# Altium PCB PCB1.PcbDoc
Units mm, origin at the board's own origin, x right, y up, seen from the top; angles counter-clockwise.
Board outline 61 x 85 mm, 4 copper layers (Top Layer, Layer 1, Layer 2, Bottom Layer), stack 0.55 mm thick; 5 components, 34 nets, 80 pads, 421 vias.
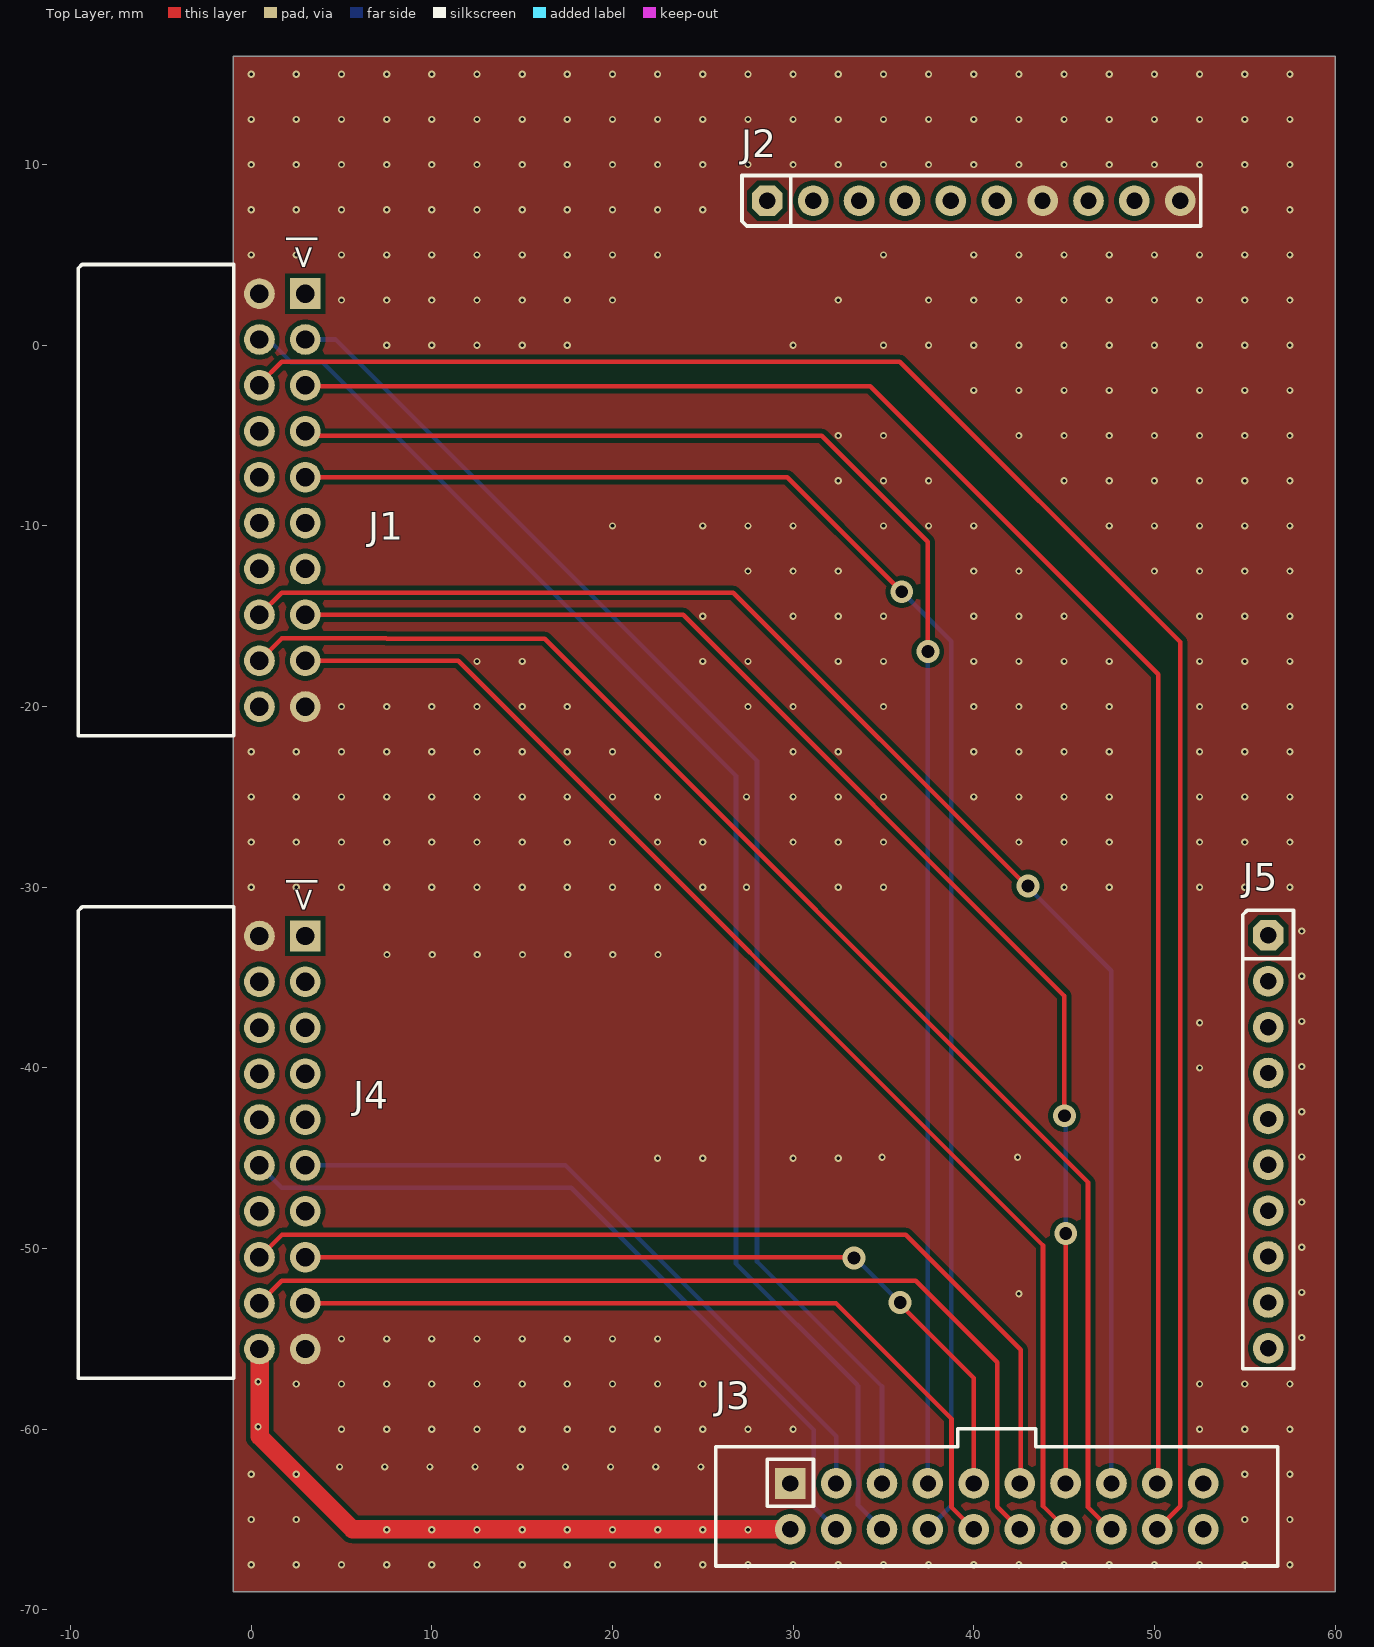
[diagram p0: Top Layer view]
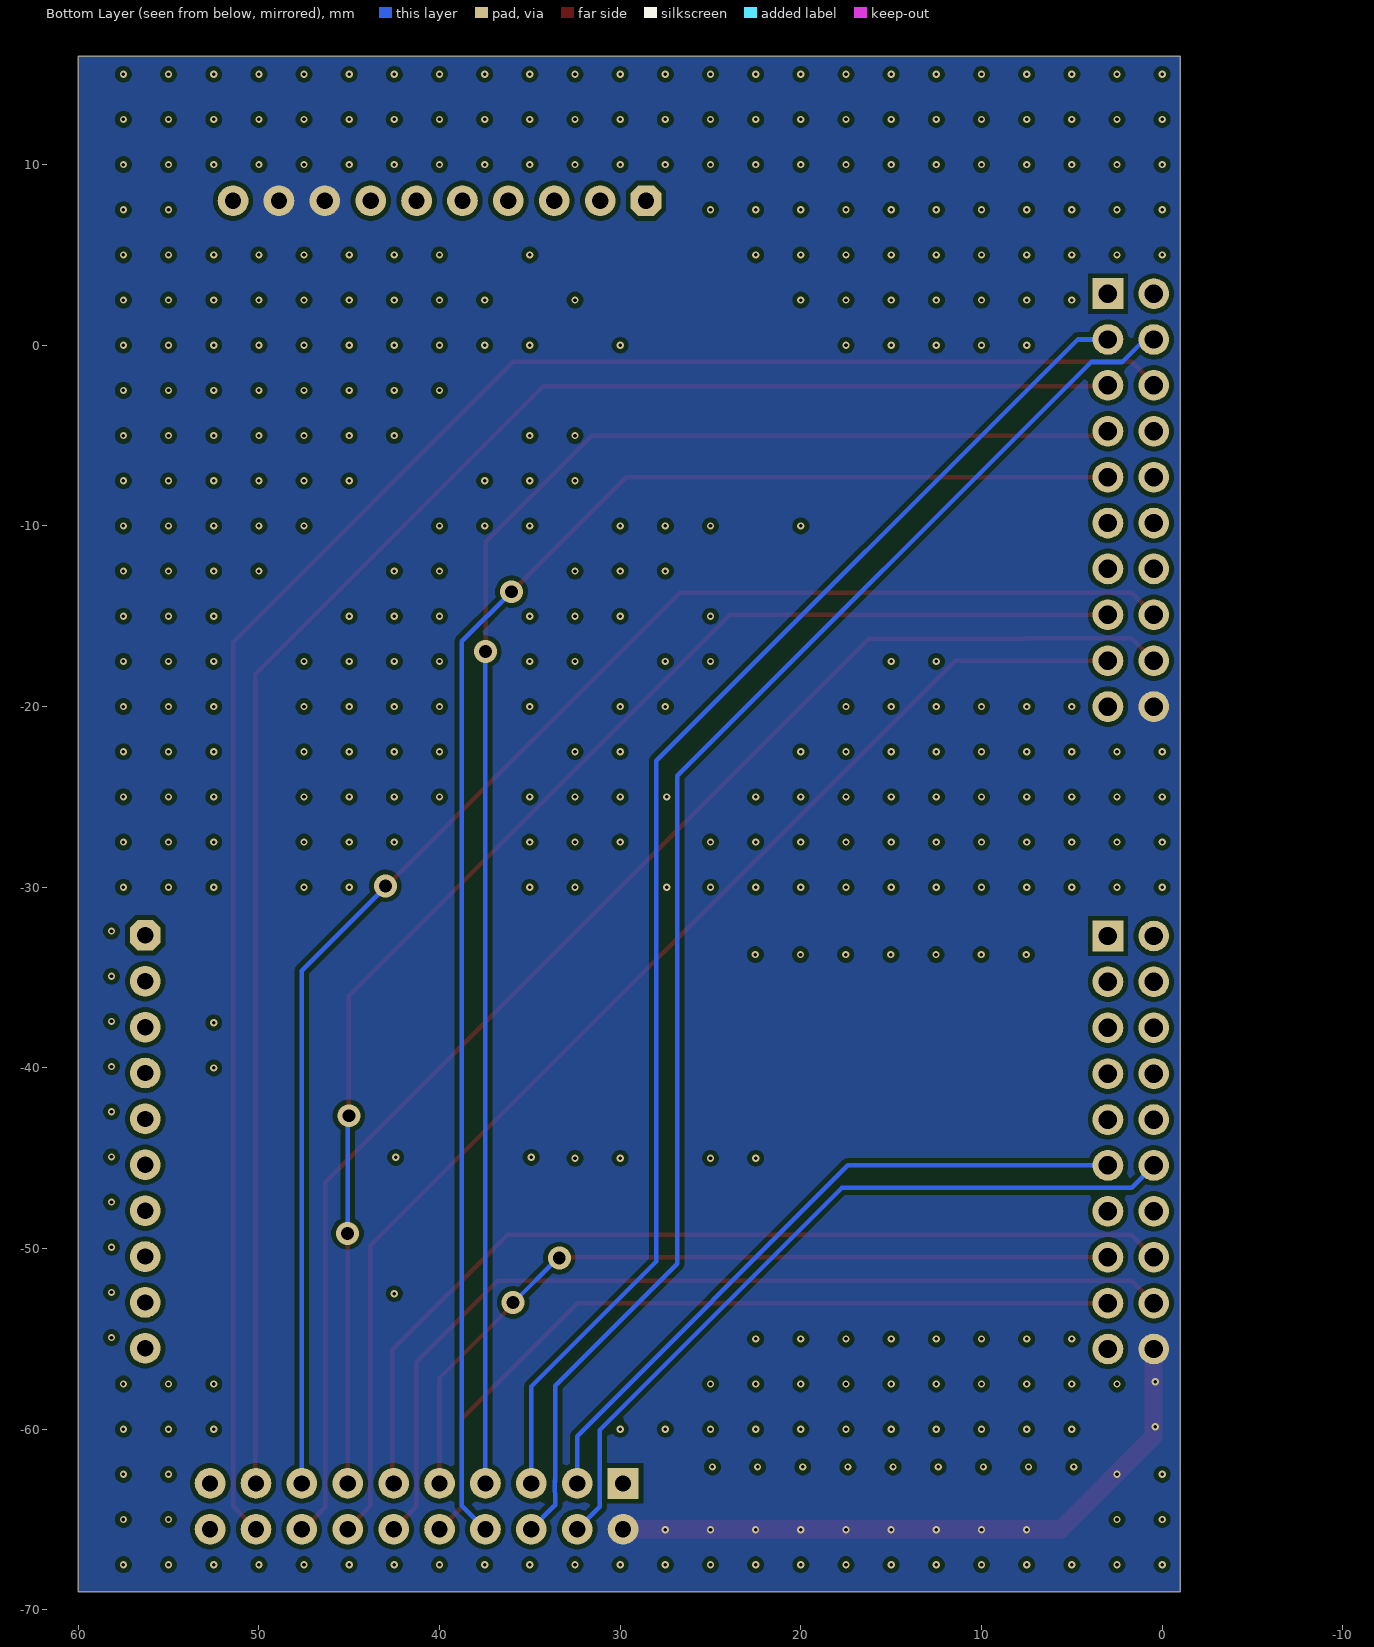
[diagram p1: Bottom Layer view, seen from below]
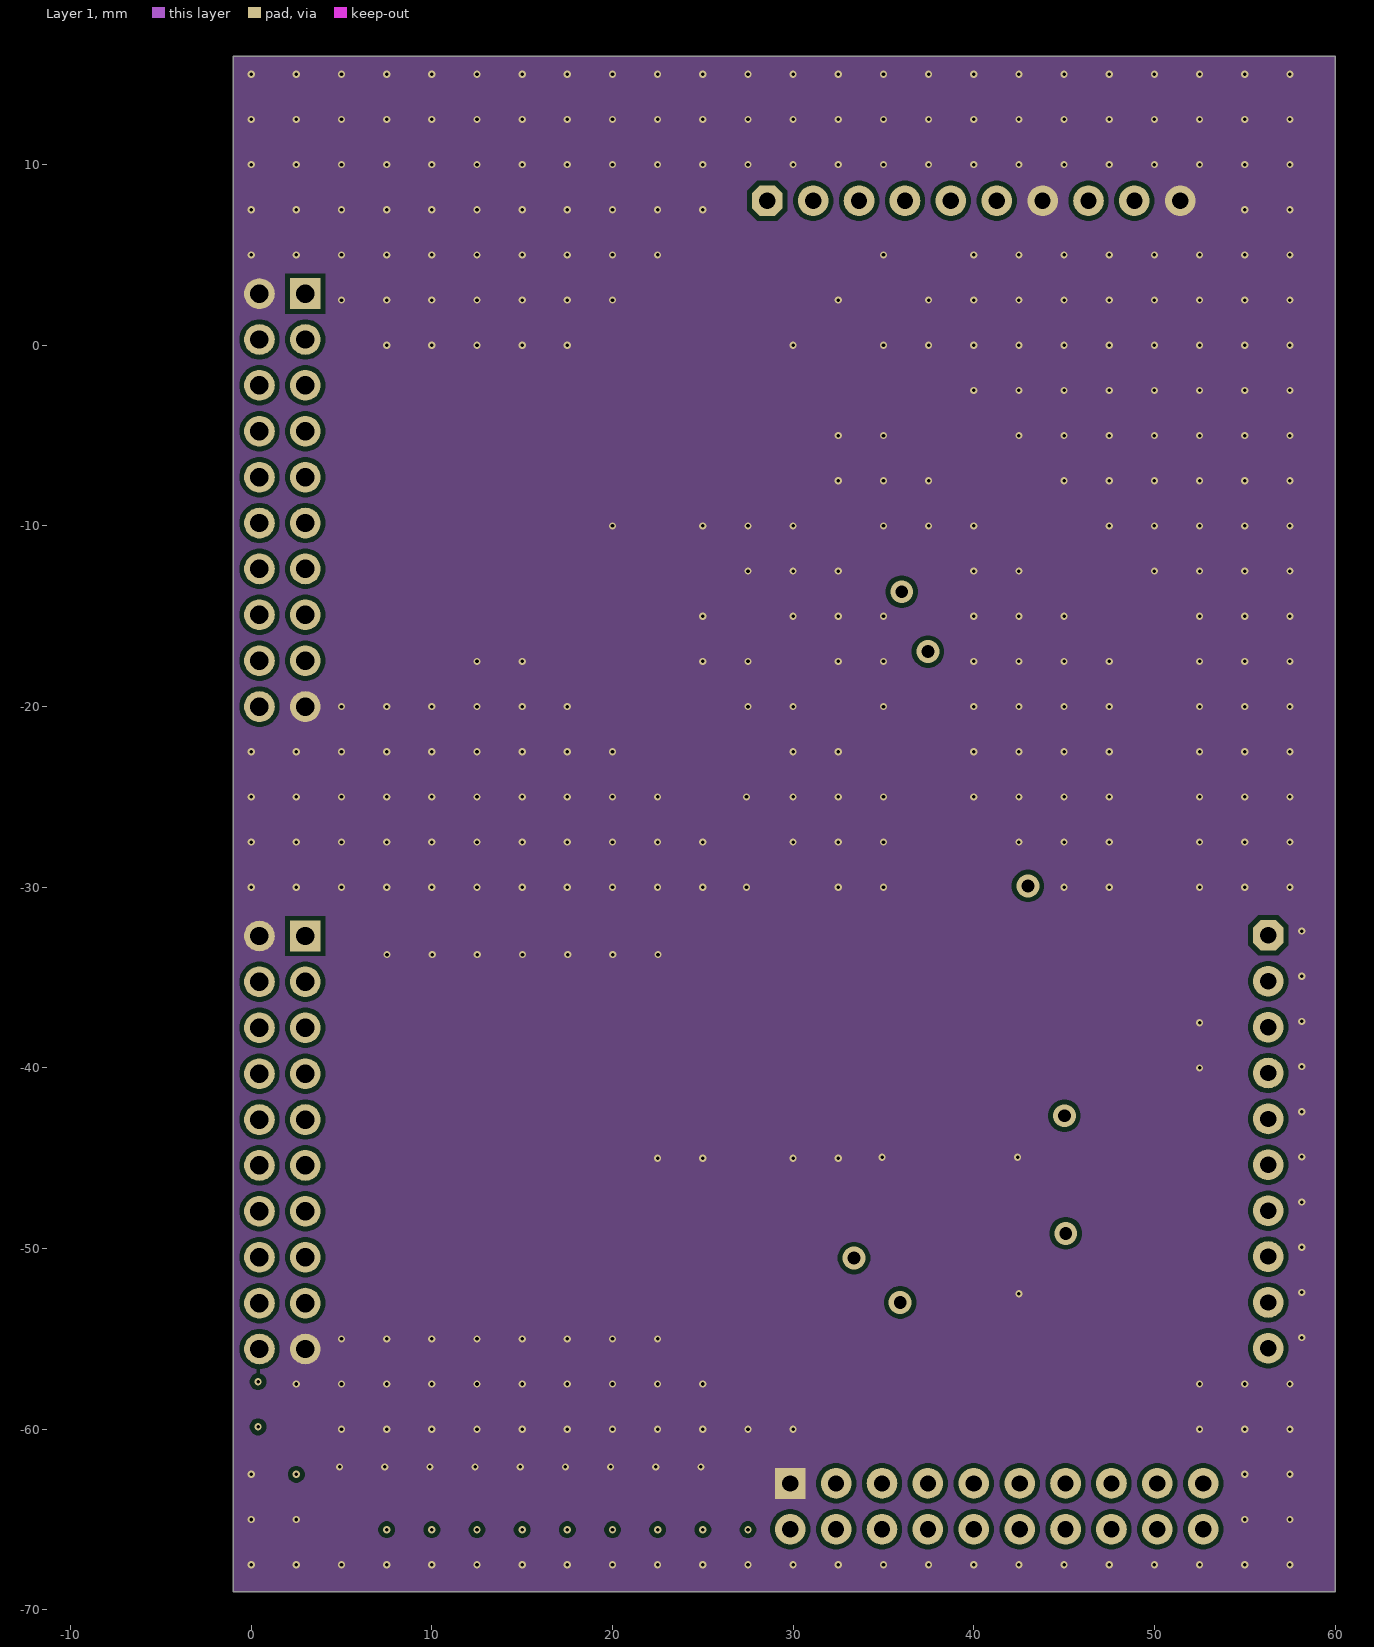
[diagram p2: Layer 1]
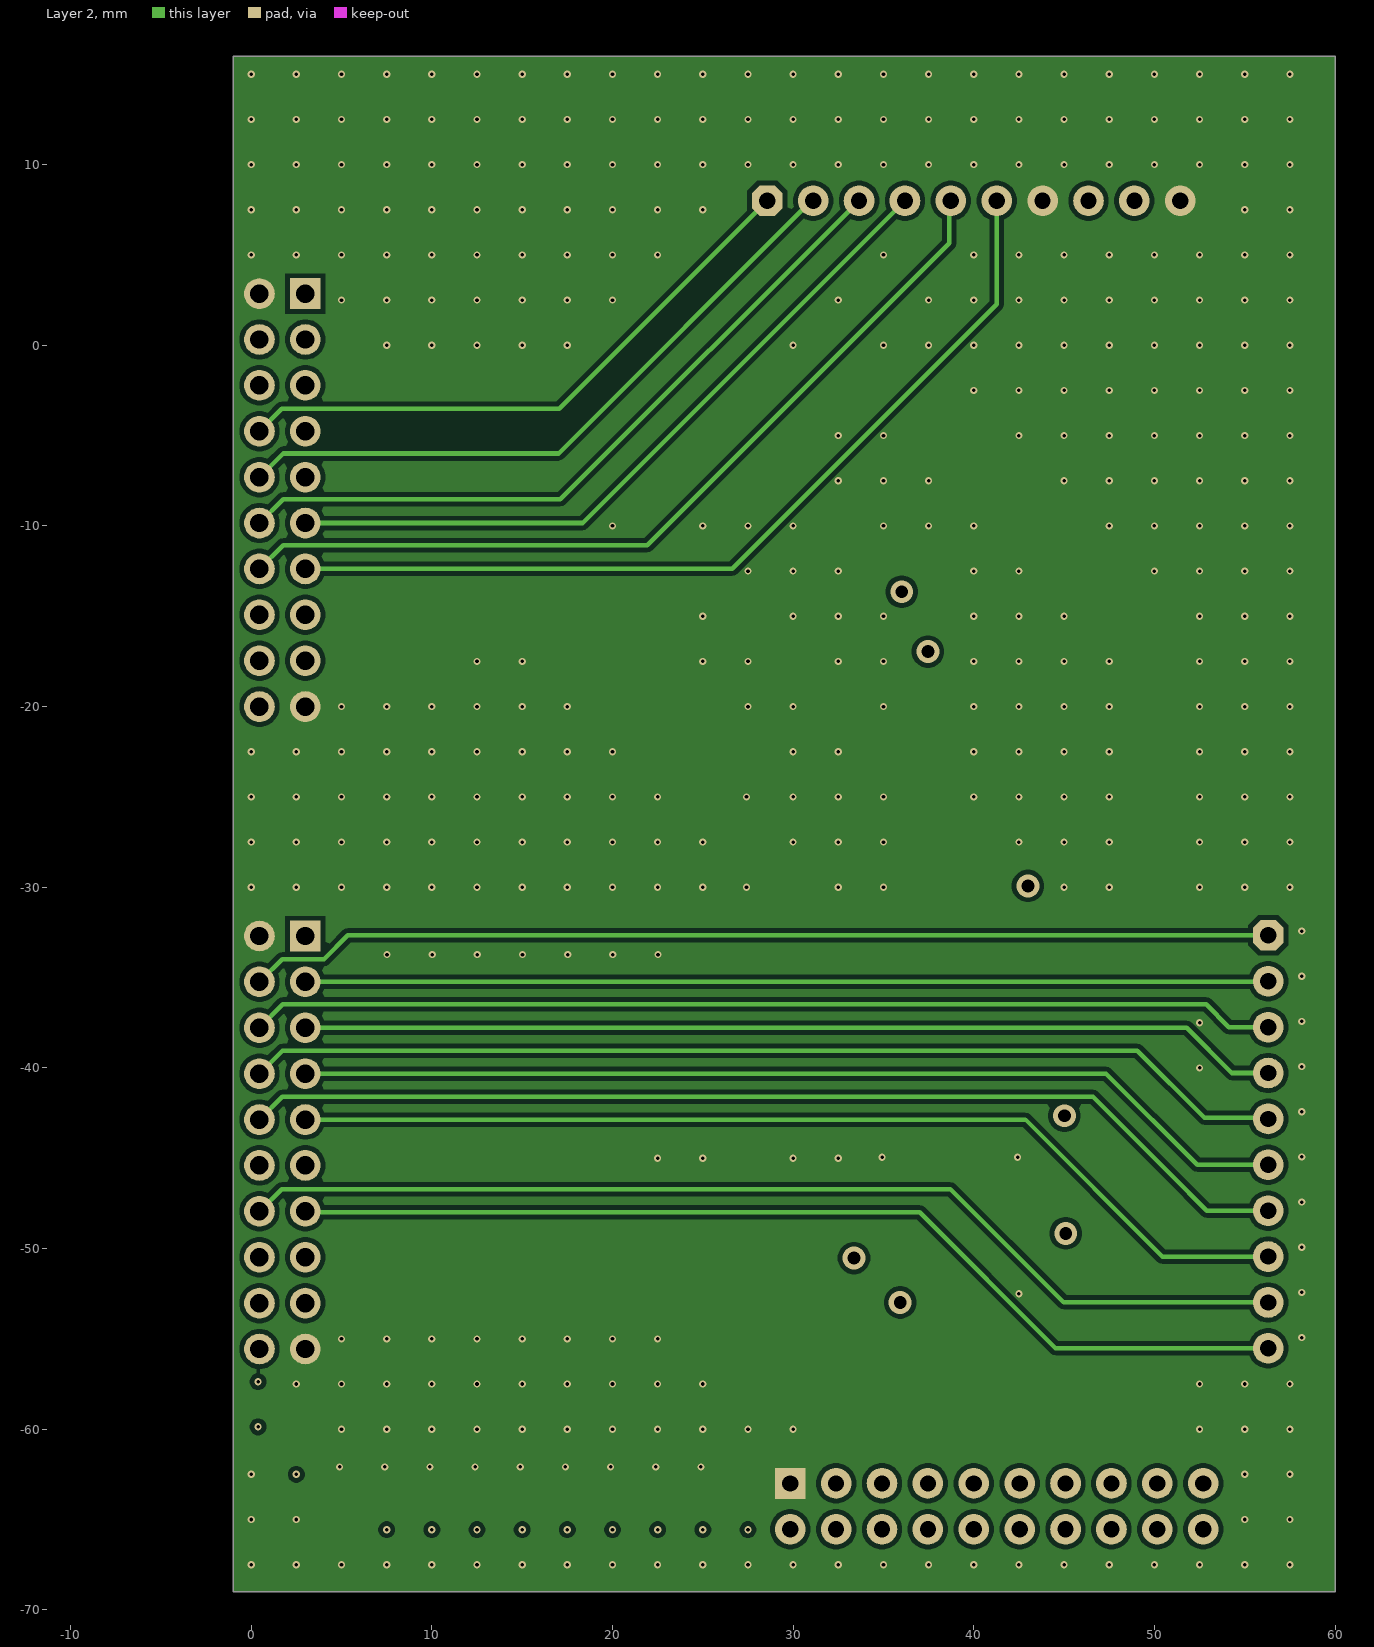
[diagram p3: Layer 2]
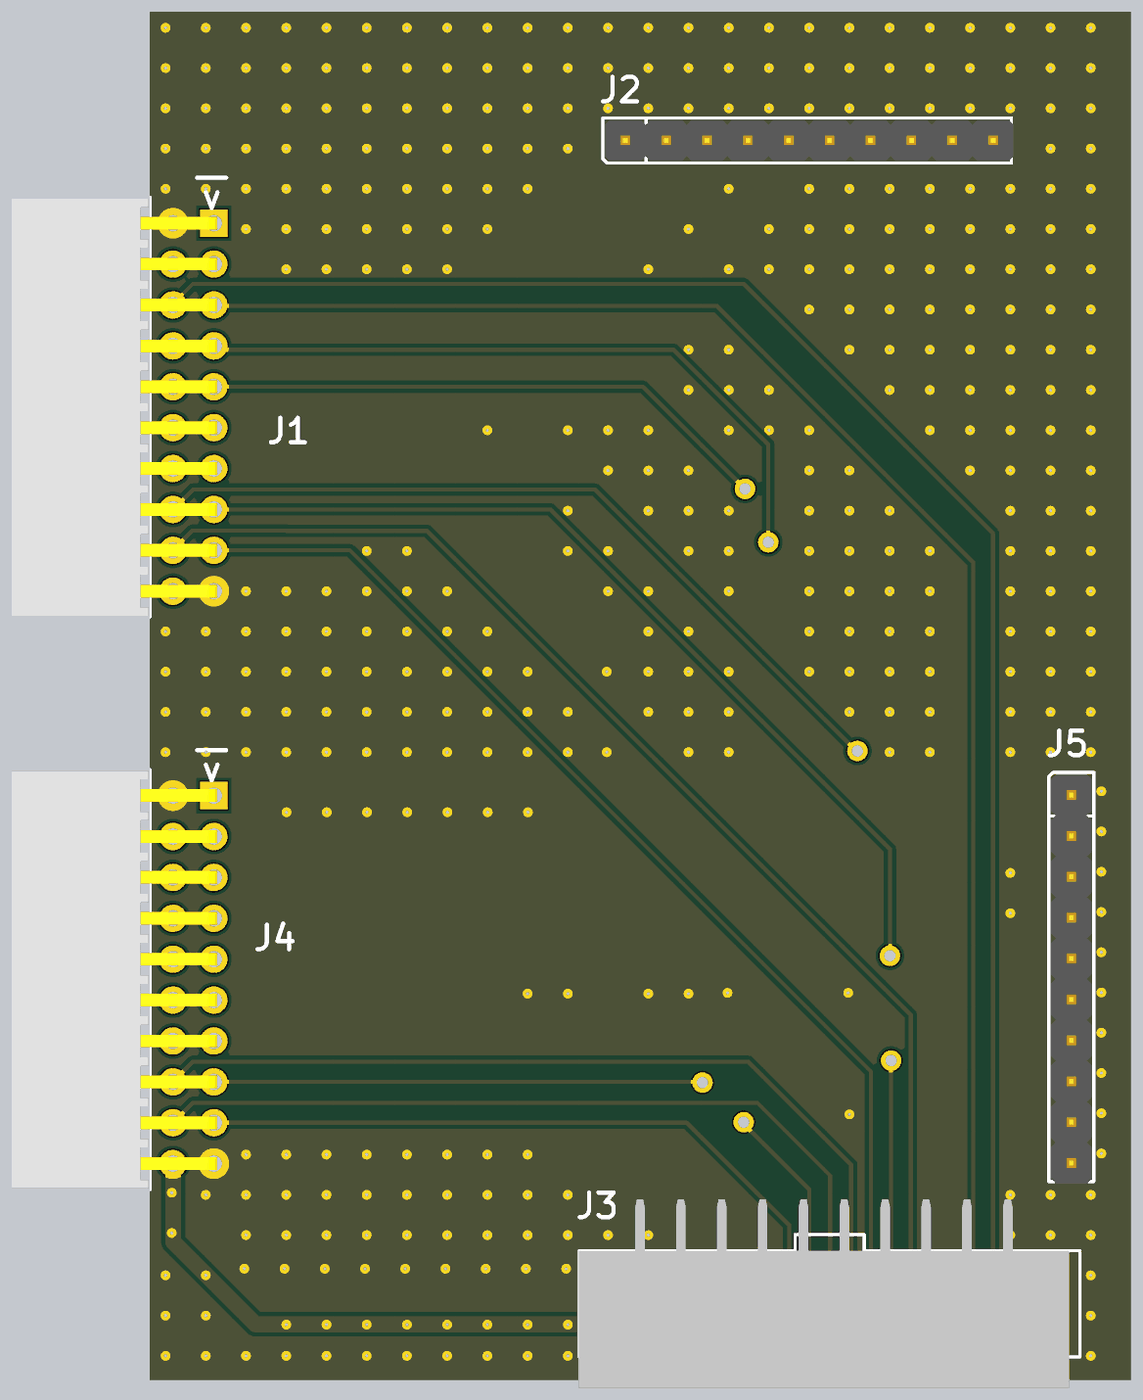
[diagram p4: 3D render of the assembled board from above, using the file's embedded part models]

## Layer stack, top to bottom
Top Solder: solder mask 0.0102, Solder Resist, Dk 3.5
Top Layer: signal copper 0.009
Dielectric 2: prepreg 0.0711, PP-006, Dk 4.1
Layer 1: signal copper 0.035
Dielectric 1: dielectric 0.32, FR-4, Dk 4.8
Layer 2: signal copper 0.035
Dielectric 3: prepreg 0.0711, PP-006, Dk 4.1
Bottom Layer: signal copper 0.009
Bottom Solder: solder mask 0.0102, Solder Resist, Dk 3.5

## Board outline
-1,-69 60,-69 60,16 -1,16

## Design rules (kind name [scope] priority, off if disabled: settings)
Clearance [All] p1: gap=0.254 ignorepadtopadclearanceinfootprint=FALSE
PolygonConnect [All] p1: connectstyle=Direct reliefconductorwidth=0.254 reliefentries=4 polygonreliefangle="90 Angle" airgapwidth=0.254
RoutingVias [All] p1: holewidth=0.711 width=1.27 viastyle="Through Hole" minholewidth=0.711 minwidth=1.27 maxholewidth=0.711 maxwidth=1.27
SolderMaskExpansion [All] p1: expansion=0.102 istentingtop=FALSE
Width [All] p1: maxlimit=0.254 minlimit=0.254 preferedwidth=0.254
30 further rules are at their usual default settings.

## Components (designator, comment, footprint, x,y, rotation, side; value= is the part's Value field where it differs from the comment)
J1 "Header 2x10" HDR_F_2.54_2x10_RA_180 1.73,-8.57 r90 top locked value="HDR-2.54 Female 2x10 RA Rotated 180"
J2 "Header 1x10" HDR_M_2.54_1x10 40,8 r0 top value="HDR-2.54 Male 1x10"
J3 "Header 2x10" HDR_F_2.54_2x10_SFH11-PBPC-D10-ST-BK 41.27,-64.27 r0 top locked value="HDR-2.54 Female 2x10"
J4 "Header 2x10" HDR_F_2.54_2x10_RA_180 1.73,-44.13 r90 top locked value="HDR-2.54 Female 2x10 RA Rotated 180"
J5 "Header 1x10" HDR_M_2.54_1x10 56.295,-44.094 r270 top value="HDR-2.54 Male 1x10"

## Footprints (in the part's own frame and the unit in brackets; to place one, negate y for a bottom-side part, rotate by r counter-clockwise, add the part's x,y. Pads: shape width x height; smd on the part's side, far side on the other; paste and mask are expansions set on the pad)
HDR_F_2.54_2x10_RA_180 [mm] "Header Female Horizontal 2x10 Way 2.54mm Pitch rotated 180"
  rect 1.7x1.7 hole 1.02: 1(11.43,-1.27)
  round 1.7 hole 1.02: 2(11.43,1.27) 3(8.89,-1.27) 4(8.89,1.27) 5(6.35,-1.27) 6(6.35,1.27) 7(3.81,-1.27) 8(3.81,1.27) 9(1.27,-1.27) 10(1.27,1.27) 11(-1.27,-1.27) 12(-1.27,1.27) 13(-3.81,-1.27) 14(-3.81,1.27) 15(-6.35,-1.27) 16(-6.35,1.27) 17(-8.89,-1.27) 18(-8.89,1.27) 19(-11.43,-1.27) 20(-11.43,1.27)
  silkscreen extent -13.04,2.7 13.04,11.3, body extent -12.95,-1.47 12.95,11.3, height 4.98
HDR_F_2.54_2x10_SFH11-PBPC-D10-ST-BK [mm] "Header Female Vertical 2x10 Way 2.54mm Pitch"
  rect 1.7x1.7 hole 0.9: 1(-11.43,1.27)
  round 1.7 hole 0.9: 2(-11.43,-1.27) 3(-8.89,1.27) 4(-8.89,-1.27) 5(-6.35,1.27) 6(-6.35,-1.27) 7(-3.81,1.27) 8(-3.81,-1.27) 9(-1.27,1.27) 10(-1.27,-1.27) 11(1.27,1.27) 12(1.27,-1.27) 13(3.81,1.27) 14(3.81,-1.27) 15(6.35,1.27) 16(6.35,-1.27) 17(8.89,1.27) 18(8.89,-1.27) 19(11.43,1.27) 20(11.43,-1.27)
  silkscreen extent -15.55,-3.3 15.55,4.3, body extent -15.24,-3 15.24,4, height 8.51
HDR_M_2.54_1x10 [mm] "Header Male Vertical 10 Way 2.54mm Pitch"
  oct 1.7x1.7 hole 0.9: 1(-11.43,0)
  round 1.7 hole 0.9: 2(-8.89,0) 3(-6.35,0) 4(-3.81,0) 5(-1.27,0) 6(1.27,0) 7(3.81,0) 8(6.35,0) 9(8.89,0) 10(11.43,0)
  silkscreen extent -12.83,-1.4 12.57,1.4, body extent -12.7,-1.27 12.7,1.27, height 5.94

## Part data
J1 J4: library part CON1532, Manufacturer 1="Sullins Connector Solutions", Manufacturer Part Number 1=PPPC102LJBN-RC, Supplier Part Number 1=S5563-ND, Category=Connector, ComponentLink1Description="SVN Datasheet", ComponentLink1URL=https://chn-vm-apps.microchip.com/mchprepo/parts/Datasheets/101_P(N)PxCxx2LJBN-RC,_10494-H.pdf, ComponentLink2Description="Local Datasheet", ComponentLink2URL=C:\ALTIUM_WORK\00001_MCHP-CDB\Datasheets\101_P(N)PxCxx2LJBN-RC,_10494-H.pdf, ComponentLink3Description="Open Symbol", ComponentLink3URL="C:\ALTIUM_WORK\00001_MCHP-CDB\Library\LibraryRefs\Header 2x10.SchLib", ComponentLink4Description="Open Footprint", ComponentLink4URL=C:\ALTIUM_WORK\00001_MCHP-CDB\Library\Footprints\HDR_F_2.54_2x10_RA_180.PcbLib, ComponentLink5Description="Open Footprint 2", ComponentLink6Description="Open Footprint 3", ComponentLink7Description="Open Footprint 4", Description_="CON HDR-2.54 Female 2x10 Rotated 180Degrees Gold TH RT ANGLE", Dev Tools Status=Production, MCHP-ID=CON1532, Owner="Jamus Griego", Populated=YES, Quantity Override=1, Restricted Sourcing=No, Revision=1, Status="MCL Design", Supplier 1=Digi-Key, Symbol="Header 2x10", Type="Header 2.54mm"
J2 J5: library part CON0105, Manufacturer 1="Aceconn Technology (Shenzhen)", Manufacturer 2="Samtec Inc.", Manufacturer Part Number 1=GPHA101-1002A001B1BA, Manufacturer Part Number 2=TSW-110-07-G-S, Manufacturer Part Number 3=TSW-110-07-S-S, Manufacturer Part Number 4=TSW-110-07-L-S, Category=Connector, ComponentLink1Description="SVN Datasheet", ComponentLink1URL=https://chn-vm-apps.microchip.com/mchprepo/parts/Datasheets/TSW-XXX-XX-XXX-X-XX-XXX-MKT.pdf, ComponentLink2Description="Local Datasheet", ComponentLink2URL=C:\ALTIUM_WORK\00001_MCHP-CDB\Datasheets\TSW-XXX-XX-XXX-X-XX-XXX-MKT.pdf, ComponentLink3Description="Open Symbol", ComponentLink3URL="C:\ALTIUM_WORK\00001_MCHP-CDB\Library\LibraryRefs\Header 1x10.SchLib", ComponentLink4Description="Open Footprint", ComponentLink4URL=C:\ALTIUM_WORK\00001_MCHP-CDB\Library\Footprints\HDR_M_2.54_1x10.PcbLib, ComponentLink5Description="Open Footprint 2", ComponentLink6Description="Open Footprint 3", ComponentLink7Description="Open Footprint 4", Description_="CON HDR-2.54 Male 1x10 Gold 5.84MH TH VERT", Dev Tools Status=Production, Manufacturer 3="Samtec Inc.", Manufacturer 4="Samtec Inc.", MCHP-ID=CON0105, Populated=Yes, Quantity Override=1, Restricted Sourcing=No, Revision=3, Status="MCL Design", Supplier 1="Aceconn Technology (Shenzhen)", Supplier 2=Digi-Key, Supplier 3=Digi-Key, Supplier 4=Digi-Key, Supplier Part Number 1=GPHA101-1002A001B1BA, Supplier Part Number 2=SAM1029-10-ND, Supplier Part Number 3=SAM1033-10-ND, Supplier Part Number 4=SAM1031-10-ND, Symbol="Header 1x10", Type="Header 2.54mm"
J3: library part CON1763, Current=3A, Manufacturer 1="Sullins Connector Solutions", Manufacturer Part Number 1=SFH11-PBPC-D10-ST-BK, Operating Temperature="-40C to +105C", Supplier Part Number 1=S9197-ND, Voltage=1000VAC, Assembly Type=TH, Category=Connector, ComponentLink1Description="SVN Datasheet", ComponentLink1URL=https://chn-vm-apps.microchip.com/mchprepo/parts/Datasheets/146_PAGE119_.100_SFH11_SERIES_FEMALE_HDR_ST_RA.pdf, ComponentLink2Description="Local Datasheet", ComponentLink2URL=C:\ALTIUM_WORK\00001_MCHP-CDB\Datasheets\146_PAGE119_.100_SFH11_SERIES_FEMALE_HDR_ST_RA.pdf, ComponentLink3Description="Open Symbol", ComponentLink3URL="C:\ALTIUM_WORK\00001_MCHP-CDB\Library\LibraryRefs\Header 2x10.SchLib", ComponentLink4Description="Open Footprint", ComponentLink4URL=C:\ALTIUM_WORK\00001_MCHP-CDB\Library\Footprints\HDR_F_2.54_2x10_SFH11-PBPC-D10-ST-BK.PcbLib, ComponentLink5Description="Open Footprint 2", ComponentLink6Description="Open Footprint 3", ComponentLink7Description="Open Footprint 4", Description_="CON HDR-2.54 Female 2x10 Gold TH", Dev Tools Status=Production, MCHP-ID=CON1763, Owner="Dragos Danaila", Populated=YES, Quantity Override=1, Restricted Sourcing=No, Revision=2, Status="MCL Design", Supplier 1=Digi-Key, Symbol="Header 2x10", Type="Header 2.54mm"

## Via types
v1: diameter 0.4, hole 0.2, Top Layer to Bottom Layer, 414 vias
v2: diameter 1.27, hole 0.711, Top Layer to Bottom Layer, 7 vias

## Nets (pads, with @x,y where several pads share a name; then routed paths per layer and width w, separated by ;. In a path a pad name is that pad's centre, name@x,y a point inside that pad or via, vN(x,y) a via of type N, cw(c..) or ccw(c..) an arc to the next point about the centre after c; other vN are vias at no path point)
3V3: J1.20 J2.8 J2.9 J3.2 J4.20 | length 36.3
  Top Layer w1: J4.20@0.475,-55.575 0.475,-60.415 5.601,-65.54 J3.2
  other v1: 7.502,-65.562 10.002,-65.562 12.502,-65.562 15.002,-65.562 17.502,-65.562 20.002,-65.562 22.502,-65.562 25.002,-65.562 27.502,-65.562 2.5,-62.5 0.384,-59.868 0.384,-57.368
D0: J1.16 J3.15 | length 84.7
  Top Layer w0.254: J1.16 1.691,-13.689 26.689,-13.689 v2@43,-30
  Bottom Layer w0.254: v2@43,-30 47.617,-34.617 J3.15@47.617,-62.997
  other v2: 42.998,-29.925
D1: J1.18 J3.16 | length 78.6
  Top Layer w0.254: J1.18 1.691,-16.229 7.479,-16.229 7.5,-16.25 16.25,-16.25 46.322,-46.322 46.322,-64.314 J3.16@47.564,-65.556
D2: J1.15 J3.13 | length 77.8
  Top Layer w0.254: J1.15 23.92,-14.92 45.018,-36.018 v2(45.018,-42.65) ; J3.13 45.086,-62.994 45.086,-49.165 v2(45.092,-49.159)
  Bottom Layer w0.254: v2(45.018,-42.65) 45.08,-42.711 v2@45.08,-49.147
D3: J1.17 J3.14 | length 70.5
  Top Layer w0.254: J1.17 11.46,-17.46 43.833,-49.833 43.833,-64.253 J3.14@45.133,-65.553
D4: J3.11 J4.16 | length 53.1
  Top Layer w0.254: J4.16 1.708,-49.232 36.232,-49.232 42.61,-55.61 J3.11@42.61,-63.359
D5: J3.12 J4.18 | length 53
  Top Layer w0.254: J4.18 1.691,-51.789 36.789,-51.789 41.295,-56.295 41.295,-64.295 J3.12
D6: J3.9 J4.15 | length 45.7
  Top Layer w0.254: J4.15 v2@33.48,-50.48 ; v2@35.849,-53.015 40,-57.166 J3.9
  Bottom Layer w0.254: v2@33.48,-50.48 33.48,-50.563 35.849,-52.932 v2@35.849,-53.015
  other v2: 35.927,-52.984 33.369,-50.527
D7: J3.10 J4.17 | length 45.1
  Top Layer w0.254: J4.17 32.375,-53.02 38.766,-59.411 38.766,-64.315 J3.10@39.992,-65.541
GND: J1.2 J1.19 J2.7 J2.10 J3.1 J4.2 J4.19
  other v1: 0,-67.5 2.5,-67.5 5,-67.5 7.5,-67.5 10,-67.5 12.5,-67.5 15,-67.5 17.5,-67.5 20,-67.5 22.5,-67.5 25,-67.5 27.5,-67.5 30,-67.5 32.5,-67.5 35,-67.5 37.5,-67.5 40,-67.5 42.5,-67.5 45,-67.5 47.5,-67.5 50,-67.5 52.5,-67.5 55,-67.5 57.5,-67.5 0,-65 2.5,-65 55,-65 57.5,-65 0,-62.5 55,-62.5 57.5,-62.5 4.895,-62.088 7.395,-62.088 9.895,-62.088 12.395,-62.088 14.895,-62.088 17.395,-62.088 19.895,-62.088 22.395,-62.088 24.895,-62.088 5,-60 7.5,-60 10,-60 12.5,-60 15,-60 17.5,-60 20,-60 22.5,-60 25,-60 27.5,-60 30,-60 52.5,-60 55,-60 57.5,-60 2.5,-57.5 5,-57.5 7.5,-57.5 10,-57.5 12.5,-57.5 15,-57.5 17.5,-57.5 20,-57.5 22.5,-57.5 25,-57.5 52.5,-57.5 55,-57.5 57.5,-57.5 5,-55 7.5,-55 10,-55 12.5,-55 15,-55 17.5,-55 20,-55 22.5,-55 58.158,-54.928 42.5,-52.5 58.158,-52.428 58.158,-49.928 58.158,-47.428 22.5,-45 25,-45 30,-45 32.5,-45 34.926,-44.952 42.426,-44.952 58.158,-44.928 58.158,-42.428 52.5,-40 58.158,-39.928 52.5,-37.5 58.158,-37.428 58.158,-34.928 7.519,-33.73 10.019,-33.73 12.519,-33.73 15.019,-33.73 17.519,-33.73 20.019,-33.73 22.519,-33.73 58.158,-32.428 0,-30 2.5,-30 5,-30 7.5,-30 10,-30 12.5,-30 15,-30 17.5,-30 20,-30 22.5,-30 25,-30 27.419,-30 32.5,-30 35,-30 45,-30 47.5,-30 52.5,-30 55,-30 57.5,-30 0,-27.5 2.5,-27.5 5,-27.5 7.5,-27.5 10,-27.5 12.5,-27.5 15,-27.5 17.5,-27.5 20,-27.5 22.5,-27.5 25,-27.5 30,-27.5 32.5,-27.5 35,-27.5 42.5,-27.5 45,-27.5 47.5,-27.5 52.5,-27.5 55,-27.5 57.5,-27.5 0,-25 2.5,-25 5,-25 7.5,-25 10,-25 12.5,-25 15,-25 17.5,-25 20,-25 22.5,-25 27.419,-25 30,-25 32.5,-25 35,-25 40,-25 42.5,-25 45,-25 47.5,-25 52.5,-25 55,-25 57.5,-25 0,-22.5 2.5,-22.5 5,-22.5 7.5,-22.5 10,-22.5 12.5,-22.5 15,-22.5 17.5,-22.5 20,-22.5 30,-22.5 32.5,-22.5 40,-22.5 42.5,-22.5 45,-22.5 47.5,-22.5 52.5,-22.5 55,-22.5 57.5,-22.5 5,-20 7.5,-20 10,-20 12.5,-20 15,-20 17.5,-20 27.5,-20 30,-20 35,-20 40,-20 42.5,-20 45,-20 47.5,-20 52.5,-20 55,-20 57.5,-20 12.5,-17.5 15,-17.5 25,-17.5 27.5,-17.5 32.5,-17.5 35,-17.5 40,-17.5 42.5,-17.5 45,-17.5 47.5,-17.5 52.5,-17.5 55,-17.5 57.5,-17.5 25,-15 30,-15 32.5,-15 35,-15 40,-15 42.5,-15 45,-15 52.5,-15 55,-15 57.5,-15 27.5,-12.5 30,-12.5 32.5,-12.5 40,-12.5 42.5,-12.5 50,-12.5 52.5,-12.5 55,-12.5 57.5,-12.5 20,-10 25,-10 27.5,-10 30,-10 35,-10 37.5,-10 40,-10 47.5,-10 50,-10 52.5,-10 55,-10 57.5,-10 32.5,-7.5 35,-7.5 37.5,-7.5 45,-7.5 47.5,-7.5 50,-7.5 52.5,-7.5 55,-7.5 57.5,-7.5 32.5,-5 35,-5 42.5,-5 45,-5 47.5,-5 50,-5 52.5,-5 55,-5 57.5,-5 40,-2.5 42.5,-2.5 45,-2.5 47.5,-2.5 50,-2.5 52.5,-2.5 55,-2.5 57.5,-2.5 7.5,0 10,0 12.5,0 15,0 17.5,0 30,0 35,0 37.5,0 40,0 42.5,0 45,0 47.5,0 50,0 52.5,0 55,0 57.5,0 5,2.5 7.5,2.5 10,2.5 12.5,2.5 15,2.5 17.5,2.5 20,2.5 32.5,2.5 37.5,2.5 40,2.5 42.5,2.5 45,2.5 47.5,2.5 50,2.5 52.5,2.5 55,2.5 57.5,2.5 0,5 2.5,5 5,5 7.5,5 10,5 12.5,5 15,5 17.5,5 20,5 22.5,5 35,5 40,5 42.5,5 45,5 47.5,5 50,5 52.5,5 55,5 57.5,5 0,7.5 2.5,7.5 5,7.5 7.5,7.5 10,7.5 12.5,7.5 15,7.5 17.5,7.5 20,7.5 22.5,7.5 25,7.5 55,7.5 57.5,7.5 0,10 2.5,10 5,10 7.5,10 10,10 12.5,10 15,10 17.5,10 20,10 22.5,10 25,10 27.5,10 30,10 32.5,10 35,10 37.5,10 40,10 42.5,10 45,10 47.5,10 50,10 52.5,10 55,10 57.5,10 0,12.5 2.5,12.5 5,12.5 7.5,12.5 10,12.5 12.5,12.5 15,12.5 17.5,12.5 20,12.5 22.5,12.5 25,12.5 27.5,12.5 30,12.5 32.5,12.5 35,12.5 37.5,12.5 40,12.5 42.5,12.5 45,12.5 47.5,12.5 50,12.5 52.5,12.5 55,12.5 57.5,12.5 0,15 2.5,15 5,15 7.5,15 10,15 12.5,15 15,15 17.5,15 20,15 22.5,15 25,15 27.5,15 30,15 32.5,15 35,15 37.5,15 40,15 42.5,15 45,15 47.5,15 50,15 52.5,15 55,15 57.5,15
HREF: J1.3 J3.5 | length 77.5
  Bottom Layer w0.254: J1.3 4.68,0.32 28,-23 28,-50.718 34.92,-57.638 J3.5
MCLK: J1.7 J3.7 | length 89.1
  Top Layer w0.254: J1.7 3.24,-5 31.574,-5 37.452,-10.878 v2@37.452,-16.989
  Bottom Layer w0.254: J3.7 v2(37.46,-16.96)
PA8: J4.9 J5.8 | length 56.4
  Layer 2 w0.254: J4.9 42.86,-42.86 50.444,-50.444 J5.8
PA13: J4.4 J5.1 | length 56.8
  Layer 2 w0.254: J4.4@0.521,-35.166 0.534,-35.166 1.718,-33.982 4.032,-33.982 5.349,-32.664 J5.1
PA14: J4.3 J5.2 | length 53.3
  Layer 2 w0.254: J4.3 J5.2@56.295,-35.24
PA22: J4.7 J5.6 | length 55.4
  Layer 2 w0.254: J4.7 47.32,-40.32 52.364,-45.364 J5.6
PA23: J4.8 J5.5 | length 58
  Layer 2 w0.254: J4.8 1.736,-39.045 49.045,-39.045 52.771,-42.771 J5.5@56.402,-42.771
PB11: J1.8 J2.1 | length 33.4
  Layer 2 w0.254: J1.8 1.696,-3.524 17.046,-3.524 J2.1
PB27: J4.5 J5.4 | length 54.3
  Layer 2 w0.254: J4.5 51.78,-37.78 54.284,-40.284 J5.4
PB28: J4.6 J5.3 | length 56.9
  Layer 2 w0.254: J4.6 1.756,-36.484 52.864,-36.484 54.124,-37.744 J5.3
PC0: J1.11 J2.4 | length 40.6
  Layer 2 w0.254: J1.11 18.35,-9.84 J2.4
PC1: J1.12 J2.3 | length 40.6
  Layer 2 w0.254: J1.12 1.769,-8.531 17.119,-8.531 J2.3
PC4: J1.14 J2.5 | length 48
  Layer 2 w0.254: J1.14 1.769,-11.071 21.929,-11.071 38.639,5.639 38.639,7.909 J2.5
PC7: J1.13 J2.6 | length 50.1
  Layer 2 w0.254: J1.13 26.62,-12.38 41.274,2.274 J2.6@41.274,7.996
PC21: J4.14 J5.9 | length 58.9
  Layer 2 w0.254: J4.14 1.691,-46.709 38.709,-46.709 44.984,-52.984 J5.9
PC22: J4.13 J5.10 | length 56.4
  Layer 2 w0.254: J4.13 3.06,-48 37,-48 44.524,-55.524 J5.10
PC24: J1.10 J2.2 | length 37
  Layer 2 w0.254: J1.10 1.769,-5.991 17.019,-5.991 31.01,8 J2.2
PCLK: J1.9 J3.8 | length 89.2
  Top Layer w0.254: J1.9 29.668,-7.3 v2(36.013,-13.645)
  Bottom Layer w0.254: v2(36.013,-13.645) 38.76,-16.392 38.76,-64.24 J3.8
PE10: J4.10 J5.7 | length 59
  Layer 2 w0.254: J4.10 1.719,-41.601 46.601,-41.601 50.872,-45.872 52.904,-47.904 J5.7
PWDN: J1.5 J3.17 | length 98.6
  Top Layer w0.254: J1.5 3.051,-2.271 34.271,-2.271 50.203,-18.203 J3.17@50.203,-63
RESET: J1.6 J3.18 | length 107.6
  Top Layer w0.254: J1.6 0.46,-2.142 1.691,-0.911 35.911,-0.911 51.427,-16.427 51.427,-64.273 J3.18
SCL: J3.4 J4.12 | length 42.8
  Bottom Layer w0.254: J4.12 1.691,-46.631 17.724,-46.631 31.137,-60.044 31.137,-64.297 J3.4
SDA: J3.3 J4.11 | length 38.2
  Bottom Layer w0.254: J4.11 17.4,-45.4 32.38,-60.38 J3.3
VSYNC: J1.4 J3.6 | length 81.4
  Bottom Layer w0.254: J1.4 0.958,0.32 2.204,-0.925 3.925,-0.925 26.838,-23.838 26.838,-50.838 33.518,-57.518 33.592,-57.592 33.592,-62.641 33.609,-62.93 cw(c32.38,-63) 33.611,-63.023 33.592,-63.988 33.592,-64.198 33.667,-64.273 J3.6@34.93,-65.536
pads on no net: J1.1 J3.19 J3.20 J4.1

## Polygon pours and split planes (outlines as drawn)
GND on Layer 1 "GND" (solid, remove dead copper, pour order 0): -1,16 -1,-69 60,-69 60,16
GND on Top Layer "GND" (solid, remove dead copper, pour order 1): -1,16 60,16 60,-69 -1,-69
GND on Layer 2 "GND" (solid, remove dead copper, pour order 2): -1,16 -1,-69 60,-69 60,16
3V3 on Bottom Layer "3V3" (solid, remove dead copper, pour order 3): -1,16 -1,-69 60,-69 60,16

## Text inside footprints (layer, text, board x,y; h text height)
J1: Top Overlay "|>" at 2.365,6.162 h1.27 r270
J3: Mechanical 11 "1" at 29.67,-63.37 h1
J4: Top Overlay "|>" at 2.365,-29.398 h1.27 r270